# EAGLE board iv4_4lw_1.2.1nousb (EAGLE 5.06)
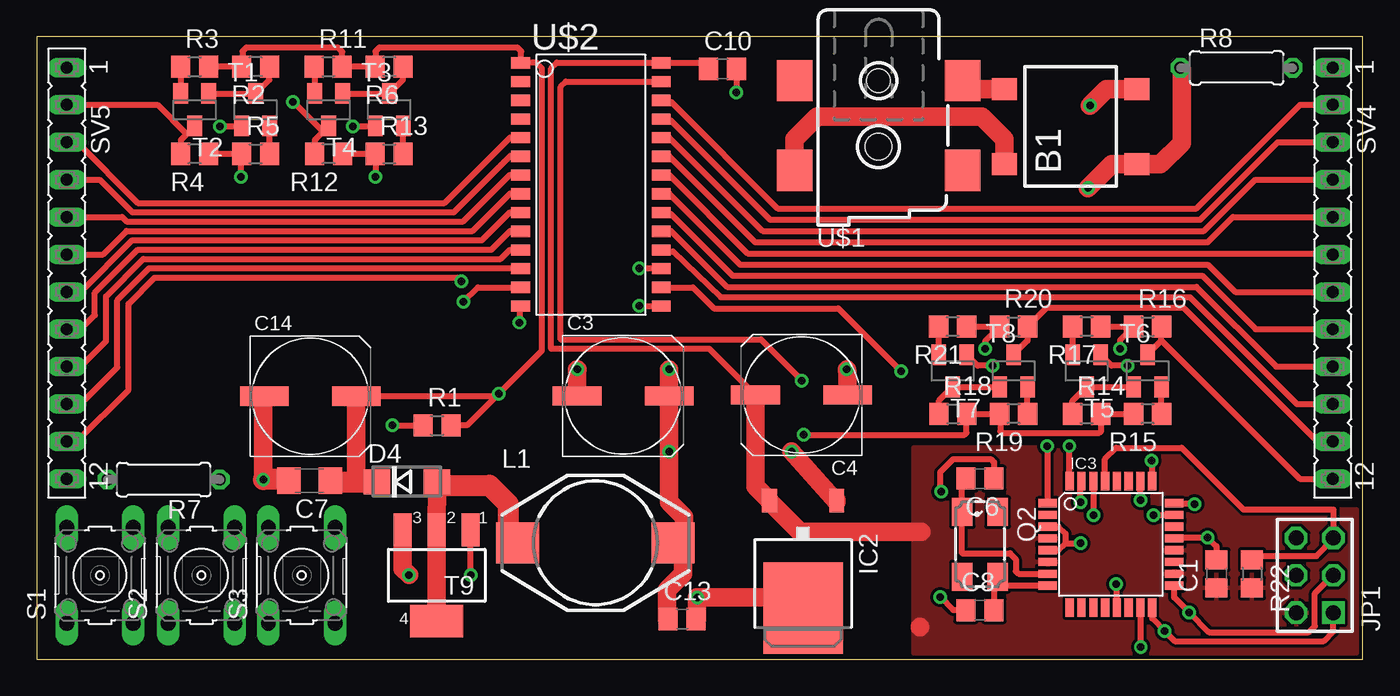
[diagram p0: board, top side]
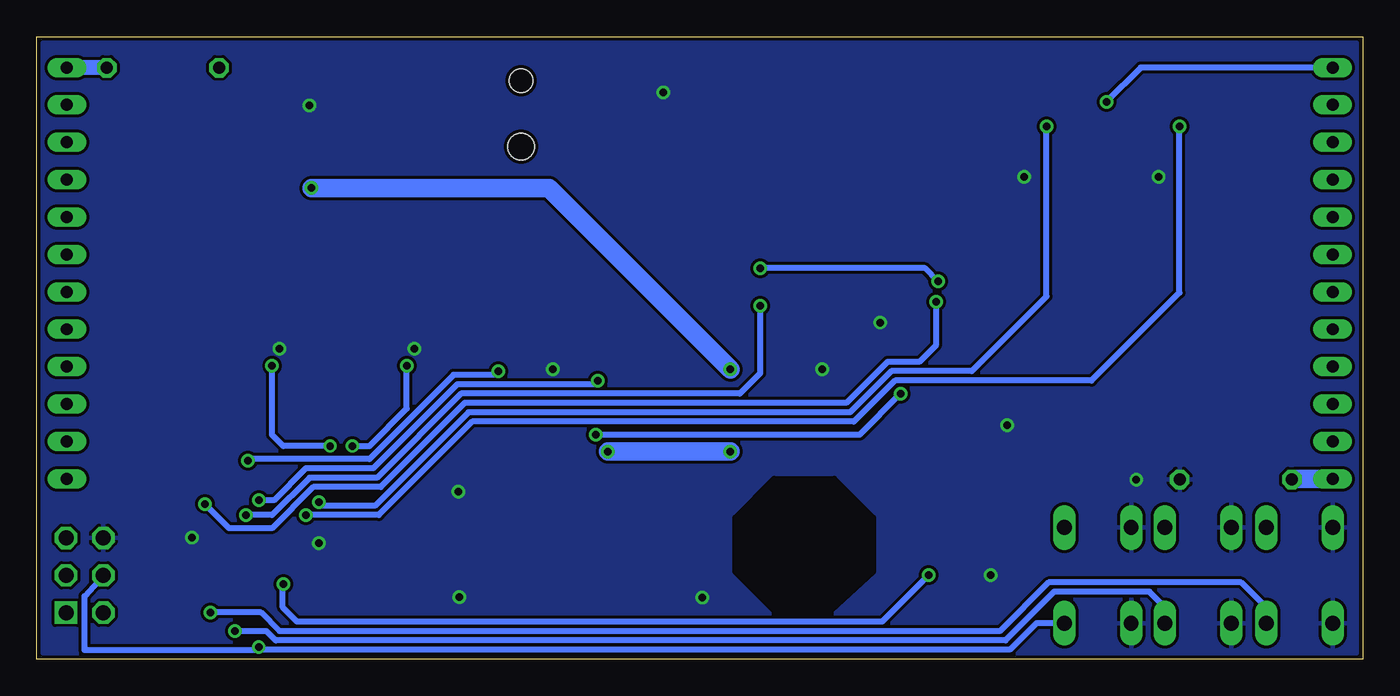
[diagram p1: board, bottom side, seen from below]

Size 90.02 x 42.27 mm. Coordinates in mm from the lower left corner, seen from the top.
Outline: 0,0 90.02,0 90.02,42.27 0,42.27 0,0
Copper layers (1*16): Top 0.035mm / dielectric 1.5mm / Bottom 0.035mm
Design rules "default *": minimum track width 8mil, minimum drill 20mil, track to track 8mil, track to pad 8mil, pad to pad 8mil, via to via 8mil, smd to smd 8mil, copper to edge 10mil, drill to drill 8mil, minimum pad ring 10mil, minimum via ring 8mil, stop-mask expansion 4mil, vias tented up to drill 0mil, thermal gap 8mil
bRestrict: area 33.2,3.3 to 42.6,12.2

## Footprints (pad centres in the part's own frame; a part is rotated, then mirrored left to right if it is on the bottom)
B40S = smd 1.5 x 1.7: + -2.55,-4.5; - 2.55,-4.5; AC1 -2.55,4.5; AC2 2.55,4.5
C0805 = smd 1.3 x 1.5: 1 -0.95,0; 2 0.95,0
UD-8X10_NICHICON = smd 3.3 x 1.3: + 3.125,0; - -3.125,0
C1206 = smd 1.6 x 1.8: 1 -1.4,0; 2 1.4,0
DO214AC = smd 1.8 x 1.7: A 2.05,0; C -2.05,0
TO252 = smd 1 x 1.6: 1 -2.28,-4.8; 2 2.28,-4.8 | smd 5.4 x 6.2: 3 0,2.5
TQFP32-08 = smd 1.27 x 0.559: 1 -4.293,2.8; 2 -4.293,2; 3 -4.293,1.2; 4 -4.293,0.4; 5 -4.293,-0.4; 6 -4.293,-1.2; 7 -4.293,-2; 8 -4.293,-2.8; 17 4.293,-2.8; 18 4.293,-2; 19 4.293,-1.2; 20 4.293,-0.4; 21 4.293,0.4; 22 4.293,1.2; 23 4.293,2; 24 4.293,2.8 | smd 0.559 x 1.27: 9 -2.8,-4.293; 10 -2,-4.293; 11 -1.2,-4.293; 12 -0.4,-4.293; 13 0.4,-4.293; 14 1.2,-4.293; 15 2,-4.293; 16 2.8,-4.293; 25 2.8,4.293; 26 2,4.293; 27 1.2,4.293; 28 0.4,4.293; 29 -0.4,4.293; 30 -1.2,4.293; 31 -2,4.293; 32 -2.8,4.293
AVR-ISP-6 = drill 1.016 square: 1 -2.54,-1.27 | drill 1.016 octagon: 2 -2.54,1.27; 3 0,-1.27; 4 0,1.27; 5 2.54,-1.27; 6 2.54,1.27
DO3316P = smd 2.92 x 2.79: 1 -5.28,0; 2 5.28,0
CTS406 = smd 1.9 x 1.4: 1 -2.2,-1.2; 2 2.2,-1.2; 3 2.2,1.2; 4 -2.2,1.2
R0805 = smd 1.3 x 1.5: 1 -0.95,0; 2 0.95,0
0207/7 = drill 0.813 octagon: 1 -3.81,0; 2 3.81,0
B3F-10XX = drill 1.016 long: 1 -3.251,2.261; 2 3.251,2.261; 3 -3.251,-2.261; 4 3.251,-2.261
FE12 = drill 0.813 long: 1 -13.97,0; 2 -11.43,0; 3 -8.89,0; 4 -6.35,0; 5 -3.81,0; 6 -1.27,0; 7 1.27,0; 8 3.81,0; 9 6.35,0; 10 8.89,0; 11 11.43,0; 12 13.97,0
SOT23 = smd 1 x 1.4: 1 -0.95,-1.1; 2 0.95,-1.1; 3 0,1.1
SOT23-BEC = smd 1 x 1.4: B -0.95,-1.1; C 0,1.1; E 0.95,-1.1
SOT223 = smd 1.219 x 2.235: 1 -2.311,-3.099; 2 0,-3.099; 3 2.311,-3.099 | smd 3.6 x 2.2: 4 0,3.099
PJ002A-SMT = smd 2.4 x 2.8: P$1 5.7,6.4; P$2 5.7,0.3; P$3 -5.7,6.4; P$4 -5.7,0.3 | hole 1.6: 0,6.4 | hole 1.8: 0,1.9
SO28W = smd 0.762 x 1.27: 1 -8.89,-4.78; 2 -7.62,-4.78; 3 -6.35,-4.78; 4 -5.08,-4.78; 5 -3.81,-4.78; 6 -2.54,-4.78; 7 -1.27,-4.78; 8 0,-4.78; 9 1.27,-4.78; 10 2.54,-4.78; 11 3.81,-4.78; 12 5.08,-4.78; 13 6.35,-4.78; 14 7.62,-4.78; 15 7.62,4.78; 16 6.35,4.78; 17 5.08,4.78; 18 3.81,4.78; 19 2.54,4.78; 20 1.27,4.78; 21 0,4.78; 22 -1.27,4.78; 23 -2.54,4.78; 24 -3.81,4.78; 25 -5.08,4.78; 26 -6.35,4.78; 27 -7.62,4.78; 28 -8.89,4.78

## Placement (x,y rotation side)
B1  RECTIFIER-B40S  [B40S]  70.18,36.17 90 top
C1  0.1uF  [C0805]  80.09,5.79 90 top
C3  200uF 20V  [UD-8X10_NICHICON]  39.8,17.88 0 top
C4  330uF 16V  [UD-8X10_NICHICON]  51.92,17.93 180 top
C6  9pF  [C0805]  64.03,12.27 180 top
C7  0.1uF 100V  [C1206]  18.52,12.12 180 top
C8  9pF  [C0805]  64.03,3.33 0 top
C10  0.1uF  [C0805]  46.56,40.08 0 top
C13  0.1uF  [C0805]  43.82,2.72 0 top
C14  22uF 100V  [UD-8X10_NICHICON]  18.57,17.86 0 top
D4  [DO214AC]  25.12,12.04 0 top
IC2  7805DT  [TO252]  52.02,5.97 180 top
IC3  ATMEGA168-20A  [TQFP32-08]  72.92,7.8 0 top
JP1  AVR-ISP-6  [AVR-ISP-6]  86.77,5.69 90 top
L1  [DO3316P]  37.92,7.9 0 top
Q2  XC1022CT-ND  [CTS406]  64.03,7.8 270 top
R1  100k  [R0805]  27.18,15.88 0 top
R2  10k  [R0805]  14.86,40.23 180 top
R3  750  [R0805]  10.72,40.23 0 top
R4  47k  [R0805]  10.72,34.32 180 top
R5  4k3  [R0805]  14.86,34.32 0 top
R6  10k  [R0805]  23.93,40.23 180 top
R7  100  [0207/7]  8.61,12.19 180 top
R8  100  [0207/7]  81.46,40.16 0 top
R11  750  [R0805]  19.79,40.23 0 top
R12  47k  [R0805]  19.81,34.32 180 top
R13  4k3  [R0805]  23.93,34.32 0 top
R14  10k  [R0805]  71.27,16.66 0 top
R15  750  [R0805]  75.41,16.66 180 top
R16  47k  [R0805]  75.41,22.58 0 top
R17  4k3  [R0805]  71.27,22.58 180 top
R18  10k  [R0805]  62.2,16.66 0 top
R19  750  [R0805]  66.32,16.66 180 top
R20  47k  [R0805]  66.32,22.58 0 top
R21  4k3  [R0805]  62.18,22.58 180 top
R22  10k  [R0805]  82.5,5.79 270 top
S1  [B3F-10XX]  4.29,5.69 90 top
S2  [B3F-10XX]  11.18,5.69 90 top
S3  [B3F-10XX]  17.98,5.69 90 top
SV4  [FE12]  87.99,26.21 270 top
SV5  [FE12]  2.03,26.21 270 top
T1  BC846  [SOT23]  14.86,37.31 0 top
T2  [SOT23-BEC]  10.72,37.31 180 top
T3  BC846  [SOT23]  23.93,37.31 0 top
T4  [SOT23-BEC]  19.81,37.31 180 top
T5  BC846  [SOT23]  71.27,19.58 180 top
T6  [SOT23-BEC]  75.41,19.58 0 top
T7  BC846  [SOT23]  62.18,19.58 180 top
T8  [SOT23-BEC]  66.32,19.58 0 top
T9  [SOT223]  27.15,5.69 180 top
U$1  CP-002APJDKR-ND  [PJ002A-SMT]  57.15,32.89 0 top
U$2  HV5812  [SO28W]  37.62,31.6 270 top

## Library data of the parts
B1 = rectifier
C1 C3 C4 C6-C8 C10 C13 C14 R1-R8 R11-R22 = rcl
D4 = diode
IC2 = linear
IC3 = avr
JP1 = atmel
L1 = inductor-coilcraft
Q2 = crystal
S1-S3 = switch-omron
SV4 SV5 = con-lsta
T1-T8 = transistor
T9 = zetex
U$1 = con-jack
U$2 = supertex-hv

## Nets
+5V: C1.1 C4.+ C10.1 IC2.2 IC3.4 IC3.6 IC3.18 IC3.20 JP1.2 R22.2 U$2.28
+12V: B1.+ C3.+ C13.1 IC2.1 L1.2 R8.1
A: SV5.5 U$2.7
B: SV4.5 U$2.23
BLANK: IC3.24 U$2.13
C: SV4.6 U$2.22
CLK: IC3.23 U$2.15
D: SV4.8 U$2.20
DIN: IC3.26 U$2.27
E: SV4.9 U$2.19
F: SV5.9 U$2.11
G: SV5.8 U$2.10
GA: R4.2 SV5.2 T2.C
GAI: IC3.30 T1.1
GATE: IC3.13 T9.1
GB: R12.2 SV5.1 T4.C
GBI: IC3.31 T3.1
GC: R16.2 SV4.12 T6.C
GCI: IC3.32 T5.1
GD: R20.2 SV4.11 T8.C
GDI: IC3.1 T7.1
GND: B1.- C1.2 C3.- C4.- C6.1 C7.2 C8.1 C10.2 C13.2 C14.- IC2.3 IC3.3 IC3.5 IC3.21 JP1.6 R1.1 R4.1 R5.1 R7.1 R12.1 R13.1 R16.1 R17.1 R20.1 R21.1 S1.1 S1.2 S2.1 S2.2 S3.1 S3.2 T9.3 U$2.14
H: SV5.6 U$2.8
I: SV4.2 U$2.26
J: SV4.3 U$2.25
K: SV4.4 U$2.24
L: SV4.10 U$2.18
LDP: SV5.7 U$2.9
M: SV5.11 U$2.17
MISO: IC3.16 JP1.1 S2.3
MOSI: IC3.15 JP1.4 S3.3
N: SV5.10 U$2.12
N$1: D4.A L1.1 T9.2 T9.4
N$2: C6.2 IC3.7 Q2.1
N$3: C8.2 IC3.8 Q2.3
N$6: R2.1 T1.3 T2.B
N$7: R3.1 T2.E
N$8: R5.2 T1.2
N$15: R6.1 T3.3 T4.B
N$16: R11.1 T4.E
N$17: R13.2 T3.2
N$19: R14.1 T5.3 T6.B
N$20: R15.1 T6.E
N$21: R17.2 T5.2
N$23: R18.1 T7.3 T8.B
N$24: R19.1 T8.E
N$25: R21.2 T7.2
O: SV5.4 U$2.6
P: SV5.3 U$2.5
RDP: SV4.7 U$2.21
RESET: IC3.29 JP1.5 R22.1
SCK: IC3.17 JP1.3 S1.3
STROBE: IC3.25 U$2.16
VAC+: B1.AC2 U$1.P$1
VAC-: B1.AC1 U$1.P$4
VFIL+: R7.2 SV5.12
VFIL-: R8.2 SV4.1
VPP: C7.1 C14.+ D4.C R1.2 R2.2 R3.2 R6.2 R11.2 R14.2 R15.2 R18.2 R19.2 U$2.1

## Tracks (layer width: path | path; a pad name or v marks a point on that pad's centre or on a via)
+5V
  Top 0.406: C10.1 45.18,40.51 42.42,40.51 42.42,40.46 U$2.28 42.37,40.51 35.31,40.51 34.93,40.13 34.93,21.08 45.64,21.08 C4.+
  Top 1.27: 59.94,2.19 59.94,2.16 | C4.+ 48.79,11.72 IC2.2 49.74,10.71 51.82,8.64 60.07,8.64
  pour Top: 59.51,0.41 89.61,0.41 89.61,10.16 81.92,10.16 77.7,14.38 59.51,14.38
+12V  (via drill 0.51)
  Top 1.27: L1.2 43.88,7.9 43.88,7.37 | 43.88,7.37 43.88,5.78 42.8,4.7 42.8,2.72 C13.1 | 42.93,17.27 v42.93,14.1 42.93,10.67 43.94,9.65 43.94,7.43 43.88,7.37 | 42.93,17.27 C3.+ | IC2.1 54.3,10.67 v51.25,14.1 | v71.37,32 72.99,33.62 B1.+ 76.29,33.62 77.72,35.05 77.72,40.08 R8.1 | v42.93,19.69 42.93,17.27
  Bottom 1.27: v42.93,14.1 v51.25,14.1 | v71.37,32 55.25,32 v42.93,19.69
A
  Top 0.406: SV5.5 5.79,30.02 6.1,29.72 28.96,29.72 32.13,32.89 32.81,32.89 U$2.7
B
  Top 0.406: SV4.5 81.2,30.02 79.5,28.32 48.77,28.32 42.93,34.16 42.42,34.16 U$2.23
BLANK  (via drill 0.51)
  Top 0.406: U$2.13 29.95,25.25 v28.96,24.26 | v78.61,10.54 77.27,10.54 IC3.24
  Bottom 0.406: v28.96,24.26 28.96,21.34 30.1,20.19 32.26,20.19 35.05,17.4 60.96,17.4 66.68,11.68 71.25,11.68 74.04,8.89 76.96,8.89 v78.61,10.54
C
  Top 0.406: SV4.6 87.94,27.61 87.76,27.56 48.26,27.56 42.93,32.89 42.42,32.89 U$2.22
CLK  (via drill 0.51)
  Top 0.406: U$2.15 40.92,23.98 v40.89,24 | v75.82,9.78 77.2,9.78 IC3.23
  Bottom 0.406: v40.89,24 40.89,19.43 42.29,18.03 61.21,18.03 66.93,12.32 71.5,12.32 74.04,9.78 v75.82,9.78
D
  Top 0.406: SV4.8 82.75,22.4 79.12,26.04 47.24,26.04 43.05,30.23 42.5,30.23 U$2.20
DIN  (via drill 0.51)
  Top 0.406: U$2.27 35.92,39.22 35.56,38.86 35.56,21.72 49.15,21.72 v51.94,18.92 | v74.93,10.8 IC3.26
  Bottom 0.406: v51.94,18.92 52.2,18.67 61.47,18.67 67.18,12.95 71.76,12.95 73.91,10.8 v74.93,10.8
E
  Top 0.406: SV4.9 84.15,19.86 78.74,25.27 46.86,25.27 43.05,29.08 42.42,29.08 U$2.19
F
  Top 0.406: SV5.9 2.97,19.86 4.7,21.59 4.7,24.64 7.24,27.18 31.5,27.18 32.13,27.81 32.81,27.81 U$2.11
G
  Top 0.406: SV5.8 2.97,22.4 3.94,23.37 3.94,24.89 6.86,27.81 30.86,27.81 32.13,29.08 32.81,29.08 U$2.10
GA
  Top 0.406: R4.2 9.77,35.26 10.18,35.67 | 10.18,35.67 T2.C | SV5.2 8.2,37.64 10.18,35.67
GAI  (via drill 0.51)
  Top 0.406: T1.1 12.46,36.21 v12.45,36.2 | v71.76,9.78 71.76,12.06 IC3.30
  Bottom 0.406: v12.45,36.2 12.45,24.89 18.42,18.92 31.75,18.92 34.54,16.13 60.45,16.13 66.8,9.78 v71.76,9.78
GATE  (via drill 0.51)
  Top 0.406: v29.46,5.72 T9.1 | v73.28,5.08 73.28,3.55 IC3.13
  Bottom 0.406: v29.46,5.72 32.64,2.54 72.36,2.54 IC3.13 73.32,5.04 v73.28,5.08
GB  (via drill 0.51)
  Top 0.406: 19.42,35.82 18.86,35.26 R12.2 | 19.42,35.82 T4.C | v17.4,37.85 19.42,35.82
  Bottom 0.406: SV5.1 15.06,40.18 v17.4,37.85
GBI  (via drill 0.51)
  Top 0.406: T3.1 22.96,36.2 v21.46,36.2 | v70.87,10.67 70.87,12.03 IC3.31
  Bottom 0.406: v21.46,36.2 21.46,24.64 26.54,19.56 32,19.56 34.8,16.76 60.71,16.76 67.06,10.41 70.87,10.41 v70.87,10.67
GC
  Top 0.406: 76.36,21.63 R16.2 | T6.C 76.36,21.63 | 76.36,21.63 85.75,12.24 SV4.12
GCI  (via drill 0.51)
  Top 0.406: 72.24,20.7 T5.1 72.97,19.94 v74.04,19.94 | IC3.32 70.1,12.11 v70.1,14.48
  Bottom 0.406: v70.1,14.48 73.28,14.48 74.04,15.24 v74.04,19.94
GD
  Top 0.406: T8.C 67.27,21.63 R20.2 67.29,22.58 68.58,23.88 77.85,23.88 86.94,14.78 SV4.11
GDI  (via drill 0.51)
  Top 0.406: 68.57,10.54 IC3.1 68.63,14.53 v68.58,14.48 | v64.9,19.94 63.87,19.94 T7.1
  Bottom 0.406: v64.9,19.94 64.9,17.02 67.44,14.48 v68.58,14.48
GND  (via drill 0.51)
  Top 0.406: R4.1 R5.1 13.84,34.25 v13.84,32.77 | R16.1 R17.1 72.26,22.62 | v61.34,4.22 62.23,3.33 C8.1 | 80.12,6.76 80.16,6.76 | IC3.21 77.25,8.23 77.25,8.26 v79.5,8.26 80.09,7.67 C1.2 80.14,6.79 | U$2.14 33.05,23.98 | U$2.14 33.02,23.8 | v32.77,22.86 32.77,23.91 U$2.14 | R16.1 74.55,22.58 | R21.1 R20.1 64.39,21.6 v64.39,21.08 | 68.63,7.37 IC3.5 69.37,7.4 69.85,7.87 | 69.85,7.87 v70.87,7.87 | IC3.3 69.36,9 69.85,8.51 69.85,7.87 | 20.7,34.25 R12.1 R13.1 v22.99,32.77 | C10.2 v47.51,38.49 v47.5,38.48 | v73.53,21.08 73.53,21.65 R16.1 | C6.1 64.98,13.38 64.77,13.59 62.23,13.59 61.34,12.7 61.34,11.43 v61.39,11.38 | v24.13,15.88 R1.1
  Top 0.813: C1.2 80.12,6.76
  Top 1.27: T9.3 24.84,6.15 v25.27,5.72 | v15.37,12.19 15.37,17.78 C14.- | C3.- 36.68,19.66 v36.7,19.69 | C13.2 44.83,2.72 v44.83,4.19 52.02,4.19 IC2.3 | C4.- 55.04,19.43 v54.99,19.69 | B1.- 72.63,38.72 v71.5,37.59
  Top 1.422: C7.2 17.12,12.19 v15.37,12.19
  pour Bottom: 89.61,0.41 0.41,0.41 0.41,41.86 89.61,41.86
H
  Top 0.406: SV5.6 4.5,27.48 6.1,29.08 29.59,29.08 32.13,31.62 32.81,31.62 U$2.8
I
  Top 0.406: SV4.2 85.78,37.64 78.74,30.61 50.29,30.61 43.05,37.85 42.5,37.85 U$2.26
J
  Top 0.406: SV4.3 84.25,35.1 78.99,29.85 49.78,29.85 43.05,36.58 42.5,36.58 U$2.25
K
  Top 0.406: SV4.4 82.73,32.56 79.25,29.08 49.28,29.08 42.93,35.43 42.42,35.43 U$2.24
L
  Top 0.406: SV4.10 85.55,17.32 78.3,24.58 46.42,24.58 43.18,27.69 42.5,27.69 U$2.18
LDP
  Top 0.406: SV5.7 2.97,24.94 6.48,28.45 30.23,28.45 32.13,30.35 32.81,30.35 U$2.9
M  (via drill 0.51)
  Top 0.406: 42.42,26.54 U$2.17 42.37,26.54 v40.89,26.54 | SV5.11 2.72,14.78 6.22,18.29 6.22,24.13 8,25.91 28.58,25.91 v28.83,25.65
  Bottom 0.406: v28.83,25.65 29.72,26.54 v40.89,26.54
MISO  (via drill 0.51 pad 0.2)
  Top 0.406: JP1.1 88.04,1.88 87.38,1.22 77.27,1.22 v76.58,1.91 75.72,2.76 IC3.16
  Bottom 0.406: S2.3 13.44,3.53 14.48,4.57 20.96,4.57 24.26,1.27 73.79,1.27 74.42,1.91 v76.58,1.91
MOSI  (via drill 0.51)
  Top 0.406: v74.96,0.81 74.96,2.65 IC3.15
  Bottom 0.406: JP1.4 85.5,5.64 86.77,4.27 86.77,0.61 74.96,0.61 v74.96,0.81 74.78,0.64 23.95,0.64 22.15,2.44 S3.3
N
  Top 0.406: SV5.10 2.97,17.32 5.46,19.81 5.46,24.38 7.62,26.54 32.81,26.54 U$2.12
N$1
  Top 1.27: T9.4 T9.2 D4.A 27.15,11.91 | 32,7.24 32.64,7.88 L1.1
  Top 1.422: 32,7.24 32,10.54 30.73,11.81 27.16,11.81 D4.A
N$2
  Top 0.406: C6.2 62.88,11.86 62.81,11.86 62.81,10.03 Q2.1 62.81,9.98 62.81,7.19 66.07,7.19 66.47,6.78 66.47,5.97 66.64,5.8 IC3.7
N$3
  Top 0.406: 64.85,5.77 Q2.3 65.03,5 | 65.03,5 IC3.8 | C8.2 65.03,3.33 65.03,5
N$6
  Top 0.406: R2.1 15.78,39.34 T1.3 T2.B
N$7
  Top 0.406: R3.1 T2.E
  Top 0.61: R3.1 9.7,40.23
N$8
  Top 0.406: R5.2 T1.2
N$15
  Top 0.406: R6.1 24.85,39.34 T3.3 T4.B
N$16
  Top 0.406: R11.1 18.86,40.23 T4.E
N$17
  Top 0.406: R13.2 T3.2
N$19
  Top 0.406: R14.1 70.32,17.53 T5.3 T6.B
N$20
  Top 0.406: R15.1 T6.E
N$21
  Top 0.406: R17.2 T5.2
N$23
  Top 0.406: R18.1 61.26,17.56 T7.3 T8.B
N$24
  Top 0.406: R19.1 T8.E
N$25
  Top 0.406: R21.2 T7.2
O
  Top 0.406: 32.74,34.04 U$2.6 32.81,34.16 32.13,34.16 28.32,30.35 6.48,30.35 4.27,32.56 SV5.4
P
  Top 0.406: SV5.3 2.74,35.1 6.86,30.99 27.69,30.99 32.13,35.43 32.81,35.43 U$2.5
RDP
  Top 0.406: SV4.7 81.36,24.94 79.5,26.8 47.75,26.8 42.93,31.62 42.42,31.62 U$2.21
RESET
  Top 0.406: R22.1 82.85,6.99 86.87,6.99 88.04,8.15 JP1.5 88.04,10.16 81.92,10.16 77.72,14.35 73.28,14.35 72.52,13.6 IC3.29
SCK  (via drill 0.51 pad 0.2)
  Top 0.406: JP1.3 87.99,5.69 86.77,4.47 86.77,2.24 86.36,1.83 79.58,1.83 v78.23,3.18 77.22,4.19 IC3.17 | IC3.17 76.78,4.97 | IC3.17 77.03,5
  Bottom 0.406: S1.3 6.55,3.51 8.26,5.21 21.34,5.21 24.64,1.91 73.53,1.91 74.8,3.18 v78.23,3.18
STROBE  (via drill 0.51)
  Top 0.406: U$2.16 44.54,25.25 45.97,23.81 54.42,23.81 v58.67,19.56 | v75.69,13.46 75.69,12.12 IC3.25
  Bottom 0.406: v58.67,19.56 58.93,19.3 61.72,19.3 67.44,13.59 75.57,13.59 v75.69,13.46
VAC+
  Top 1.27: B1.AC2 63.42,38.72 U$1.P$1
VAC-
  Top 1.27: B1.AC1 65.68,35.33 64.18,36.83 52.96,36.83 51.44,35.31 51.44,33.21 U$1.P$4
VFIL+
  Bottom 1.27: R7.2 4.5,12.24 SV5.12
VFIL-
  Bottom 1.016: R8.2 85.42,40.18 SV4.1
VPP  (via drill 0.51)
  Top 0.406: 32.81,40.51 U$2.1 32.89,40.54 32.89,41.28 32.64,41.53 23.24,41.53 22.99,41.28 22.99,40.24 R6.2 R11.2 20.74,41.24 20.45,41.53 14.22,41.53 13.97,41.28 13.97,40.3 R2.2 R3.2 | D4.C 23.11,12.01 | 74.42,16.62 R15.2 R14.2 72.26,16.62 72.26,15.49 72.14,15.37 65.53,15.37 65.41,15.49 65.41,16.63 R19.2 R18.2 63.12,16.63 63.12,15.37 62.99,15.24 v52.07,15.24 | C14.+ 31.19,17.86 v31.37,18.03 | v31.37,18.03 34.29,20.96 34.29,40.13 33.91,40.51 32.86,40.51 | R1.2 29.21,15.88 v31.37,18.03
  Top 0.61: 32.86,40.51 U$2.1
  Top 1.27: C14.+ 21.69,12.27 21.46,12.04
  Top 1.422: C7.1 19.92,12.04 21.46,12.04 D4.C
  Bottom 0.406: v52.07,15.24 34.16,15.24 v31.37,18.03

## Text on the board
tDocu: 750 | 10k | P | N | 47k | 4k3 | 4k3 | 47k | N | P | 10k | 750